# Altium PCB cap_sensor_host.PcbDoc (part 1 of 2)
Units mm, origin at the board's own origin, x right, y up, seen from the top; angles counter-clockwise.
Board outline 190 x 74 mm, 2 copper layers (Top Layer, Bottom Layer); 162 components, 95 nets, 418 pads, 260 vias.
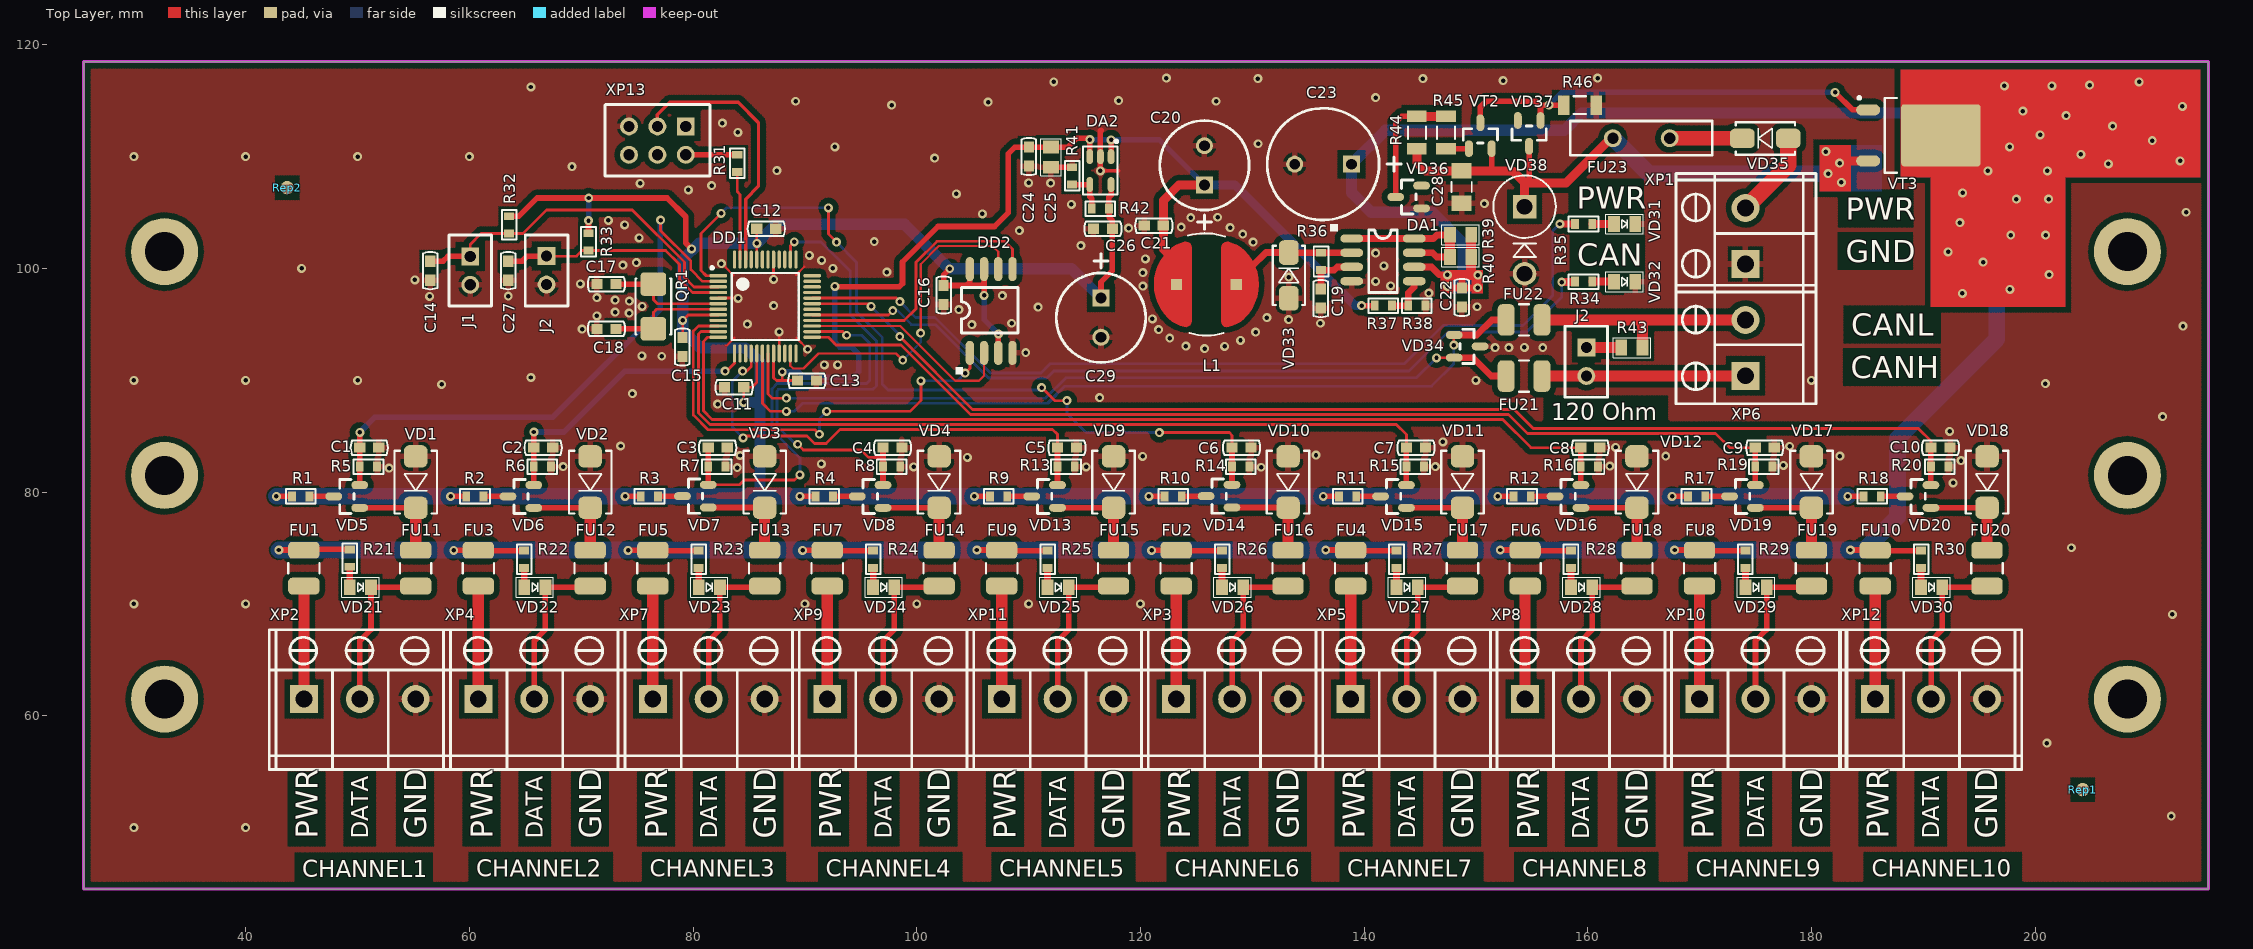
[diagram p0: Top Layer view]
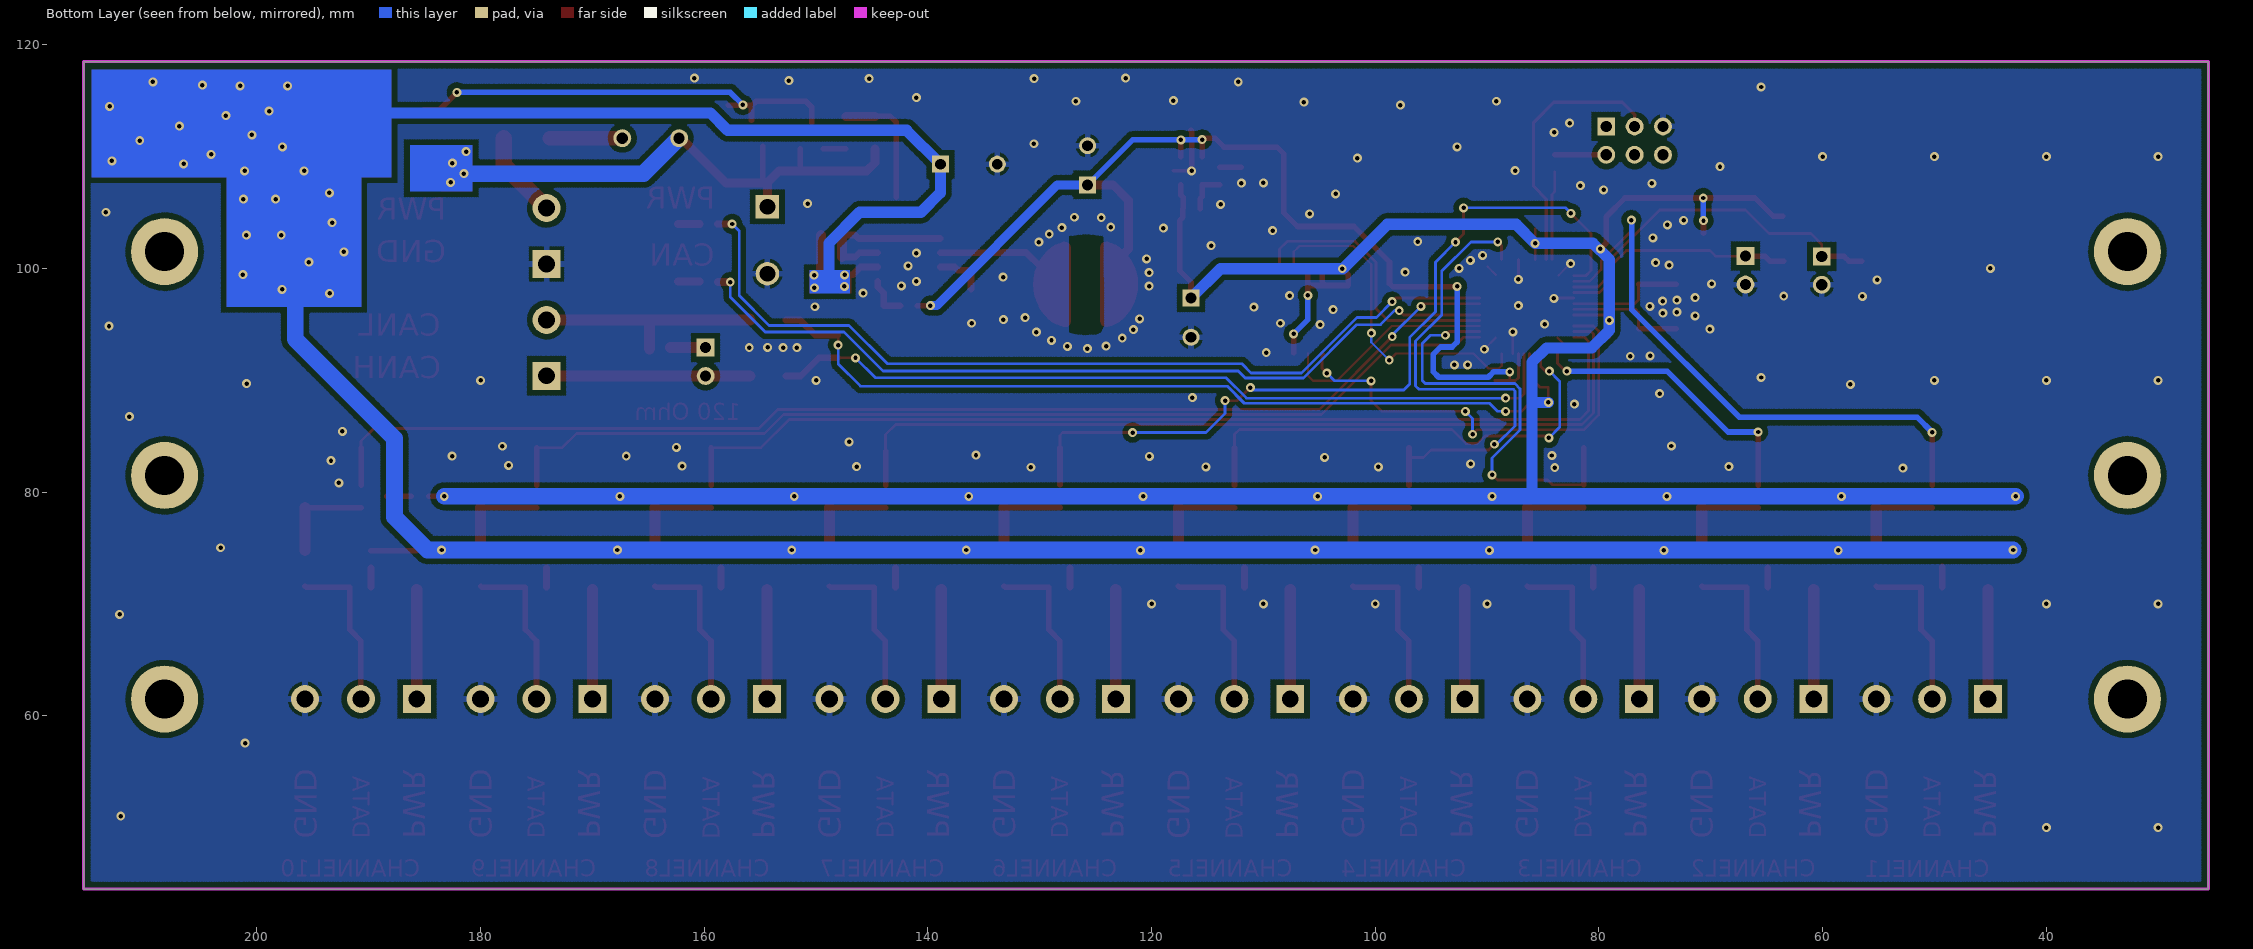
[diagram p1: Bottom Layer view, seen from below]

## Layer stack, top to bottom
Top Solder: solder mask 0.0102, Solder Resist, Dk 3.5
Top Layer: signal copper 0.0356
Dielectric 1: dielectric 0.32, FR-4, Dk 4.8
Bottom Layer: signal copper 0.0356
Bottom Solder: solder mask 0.0102, Solder Resist, Dk 3.5

## Board outline
25.5,44.5 215.5,44.5 215.5,118.5 25.5,118.5

## Design rules (kind name [scope] priority, off if disabled: settings)
Clearance Clearance_Poly [InPoly] p1: gap=0.5
Clearance [All] p2: gap=0.2
ComponentClearance [All] p1: gap=0 collisioncheckmode=3 verticalgap=0 showdistances=FALSE
HoleSize [All] p1: absolutevalues=TRUE maxlimit=6 minlimit=0.025 maxpercent=80.000 minpercent=20.000
MinimumSolderMaskSliver [All] p1: minsoldermaskwidth=0.1
PolygonConnect PolygonConnect_MCU [InComponent('DD1')] p1: connectstyle=Relief reliefconductorwidth=0.25 reliefentries=4 polygonreliefangle="90 Angle" airgapwidth=0.2
PolygonConnect PolygonConnect_term [IsPad And (PadYSize_TopLayer > 1.5) And InComponent('DA2') OR InComponent('VT3')AND InNet('+12V')] p2: connectstyle=Direct reliefconductorwidth=0.254 reliefentries=4 polygonreliefangle="90 Angle" airgapwidth=0.254
PolygonConnect PolygonConnect_via [IsVia] p3: connectstyle=Direct reliefconductorwidth=0.254 reliefentries=4 polygonreliefangle="90 Angle" airgapwidth=0.254
PolygonConnect [All] p4: connectstyle=Relief reliefconductorwidth=0.5 reliefentries=4 polygonreliefangle="90 Angle" airgapwidth=0.3
RoutingVias [All] p1: holewidth=0.4 width=0.8 viastyle="Through Hole" minholewidth=0.3 minwidth=0.6 maxholewidth=0.5 maxwidth=1
SilkToSilkClearance [All] p1: silktosilkclearance=0
SilkToSolderMaskClearance [IsPad] p1: minsilkscreentomaskgap=0.05 clearancetoexposedcopper=TRUE
SolderMaskExpansion SolderMaskExpansion_1 [IsPad And (PadYSize_TopLayer <= 0.45)] p1: expansion=0.05
SolderMaskExpansion SolderMaskExpansion_via [IsVia] p2: expansion=-10
SolderMaskExpansion [All] p3: expansion=0.076
Width [All] p1: maxlimit=5 minlimit=0.2 preferedwidth=0.5
25 further rules are at their usual default settings.

## Classes and differential pairs
component class Power: C19 C20 C21 C22 C23 C24 C25 C26 C28 C29 DA1 DA2 FU21 FU22 FU23 J2 L1 R36 R37 R38 R39 R40 R41 R42 R43 R44 R45 R46 VD33 VD34 VD35 VD36 VD37 VD38 VT2 VT3
component class Connectors: FU1 FU2 FU3 FU4 FU5 FU6 FU7 FU8 FU9 FU10 XP1 XP2 XP3 XP4 XP5 XP6 XP7 XP8 XP9 XP10 XP11 XP12
component class Input_scheme: C1 C2 C3 C4 C5 C6 C7 C8 C9 C10 FU11 FU12 FU13 FU14 FU15 FU16 FU17 FU18 FU19 FU20 R1 R2 R3 R4 R5 R6 R7 R8 R9 R10 R11 R12 R13 R14 R15 R16 R17 R18 R19 R20 VD1 VD2 VD3 VD4 VD5 VD6 VD7 VD8 VD9 VD10 VD11 VD12 VD13 VD14 VD15 VD16 VD17 VD18 VD19 VD20
component class LED_indication: R21 R22 R23 R24 R25 R26 R27 R28 R29 R30 VD21 VD22 VD23 VD24 VD26 VD27 VD28 VD29 VD30
component class MCU: C11 C12 C13 C14 C15 C16 C17 C18 C27 DD1 DD2 J1 J2 QR1 R31 R32 R33 R34 R35 Rep1 Rep2 VD31 VD32 XP13

## Components (designator, comment, footprint, x,y, rotation, side; value= is the part's Value field where it differs from the comment)
C1 "0.1uF" CC0603 51.05,83.975 r180 top
C2 "0.1uF" CC0603 66.6,83.975 r180 top
C3 "0.1uF" CC0603 82.2,83.975 r180 top
C4 "0.1uF" CC0603 97.825,83.975 r180 top
C5 "0.1uF" CC0603 113.425,83.975 r180 top
C6 "0.1uF" CC0603 129.05,83.975 r180 top
C7 "0.1uF" CC0603 144.65,83.975 r180 top
C8 "0.1uF" CC0603 160.225,83.975 r180 top
C9 "0.1uF" CC0603 175.825,83.975 r180 top
C10 "0.1uF" CC0603 191.55,83.975 r180 top
C11 "0.1uF" CC0603 83.675,89.375 r0 top
C12 "0.1uF" CC0603 86.55,103.55 r180 top
C13 "0.1uF" CC0603 90.175,89.975 r180 top
C14 "220pF" CC0603 56.5,99.8 r90 top
C15 "0.1uF" CC0603 79.05,92.975 r270 top
C16 "0.1uF" CC0603 102.4,97.625 r270 top
C17 "22pF" CC0603 72.25,98.6 r0 top
C18 "22pF" CC0603 72.25,94.6 r0 top
C19 "330pF" CC0603 136.125,97.3 r90 top
C20 "1000uFx10V" CC8X3.5 125.725,107.475 r90 top
C21 "0.1uF" CC0603 121.2,103.825 r0 top
C22 "0.1uF" CC0603 148.75,97.4 r90 top
C23 "470uF" CC16X10_CAP0.5(1)(Primary) 138.875,109.325 r180 top
C24 "0.1uF" CC0603 110.025,110 r270 top
C25 "4.7uF 6.3V" CC0805 112,109.95 r90 top
C26 "0.1uF" CC0603 116.65,103.55 r180 top
C27 "220pF" CC0603 63.475,99.8 r90 top
C28 "0.1uFx250V" CC1206 148.725,107.275 r90 top
C29 "1000uFx6.3V" CC8X3.5 116.475,97.35 r270 top
DA1 "MC33063" SO-8 138.9,102.675 r270 top
DA2 "AP2210K-ADJTRG1" SOT23-5 116.425,108.75 r270 top
DD1 "LPC11C24FBD48" LQFP-48 86.45,96.6 r0 top
DD2 "M25PE16" EIAJ_SO8 104.75,92.45 r90 top
FU1 "MICROSMD010F-2" RC1210 45.2,73.2 r270 top
FU2 "MICROSMD010F-2" RC1210 123.2,73.2 r270 top
FU3 "MICROSMD010F-2" RC1210 60.8,73.2 r270 top
FU4 "MICROSMD010F-2" RC1210 138.8,73.2 r270 top
FU5 "MICROSMD010F-2" RC1210 76.4,73.2 r270 top
FU6 "MICROSMD010F-2" RC1210 154.4,73.2 r270 top
FU7 "MICROSMD010F-2" RC1210 92,73.2 r270 top
FU8 "MICROSMD010F-2" RC1210 170,73.2 r270 top
FU9 "MICROSMD010F-2" RC1210 107.6,73.2 r270 top
FU10 "MICROSMD010F-2" RC1210 185.7,73.2 r270 top
FU11 "MICROSMD010F-2" RC1210 55.2,73.2 r90 top
FU12 "MICROSMD010F-2" RC1210 70.8,73.2 r90 top
FU13 "MICROSMD010F-2" RC1210 86.4,73.2 r90 top
FU14 "MICROSMD010F-2" RC1210 102,73.2 r90 top
FU15 "MICROSMD010F-2" RC1210 117.6,73.2 r90 top
FU16 "MICROSMD010F-2" RC1210 133.2,73.2 r90 top
FU17 "MICROSMD010F-2" RC1210 148.8,73.2 r90 top
FU18 "MICROSMD010F-2" RC1210 164.4,73.2 r90 top
FU19 "MICROSMD010F-2" RC1210 180,73.2 r90 top
FU20 "MICROSMD010F-2" RC1210 195.7,73.2 r90 top
FU21 "MICROSMD010F-2" RC1210 154.3,90.375 r0 top
FU22 "MICROSMD010F-2" RC1210 154.3,95.4 r0 top
FU23 "RXE-110" RXE-110 167.325,111.65 r180 top
J1 "PLS-02" PIN2W 60.075,101.075 r270 top
J2 "PLS-02" PIN2W 159.875,92.925 r270 top
J2 "PLS-02" PIN2W 66.9,101.1 r270 top
L1 "220uH" SDR0805 125.9,98.575 r0 top
QR1 "NX5032GA-12.000MHz LN-CD-1" AC5032_2 76.45,96.6 r270 top
R1 "4k7" RC0603 44.925,79.625 r180 top
R2 "4k7" RC0603 60.5,79.625 r180 top
R3 "4k7" RC0603 76.1,79.625 r180 top
R4 "4k7" RC0603 91.725,79.625 r180 top
R5 "100k" RC0603 50.975,82.275 r180 top
R6 "100k" RC0603 66.525,82.275 r180 top
R7 "100k" RC0603 82.125,82.275 r180 top
R8 "100k" RC0603 97.75,82.275 r180 top
R9 "4k7" RC0603 107.325,79.625 r180 top
R10 "4k7" RC0603 122.925,79.625 r180 top
R11 "4k7" RC0603 138.525,79.625 r180 top
R12 "4k7" RC0603 154.125,79.625 r180 top
R13 "100k" RC0603 113.35,82.275 r180 top
R14 "100k" RC0603 128.975,82.275 r180 top
R15 "100k" RC0603 144.575,82.275 r180 top
R16 "100k" RC0603 160.15,82.275 r180 top
R17 "4k7" RC0603 169.725,79.625 r180 top
R18 "4k7" RC0603 185.425,79.625 r180 top
R19 "100k" RC0603 175.75,82.275 r180 top
R20 "100k" RC0603 191.475,82.275 r180 top
R21 "4k7" RC0603 49.3,74.1 r90 top
R22 "4k7" RC0603 64.9,74 r90 top
R23 "4k7" RC0603 80.5,74 r90 top
R24 "4k7" RC0603 96.1,74 r90 top
R25 "4k7" RC0603 111.7,74 r90 top
R26 "4k7" RC0603 127.3,74 r90 top
R27 "4k7" RC0603 142.9,74 r90 top
R28 "4k7" RC0603 158.5,74 r90 top
R29 "4k7" RC0603 174.1,74 r90 top
R30 "4k7" RC0603 189.8,74 r90 top
R31 "100E" RC0603 83.95,109.4 r90 top
R32 "10k" RC0603 63.55,103.9 r270 top
R33 "10k" RC0603 70.65,102.375 r270 top
R34 "330E" RC0603 159.625,98.825 r0 top
R35 "330E" RC0603 159.625,103.975 r0 top
R36 "560k 1%" RC0603 136.15,100.625 r90 top
R37 "3k 1%" RC0603 141.725,96.675 r0 top
R38 "1k 1%" RC0603 144.725,96.675 r180 top
R39 "1E" RC0805 148.625,103 r0 top
R40 "1E" RC0805 148.625,101.025 r0 top
R41 "18k 1%" RC0603 113.9,108.275 r270 top
R42 "11k 1%" RC0603 116.425,105.35 r0 top
R43 "120E" RC0805 163.95,92.925 r180 top
R44 "220k" RC1206 144.725,112.15 r270 top
R45 "220k" RC1206 147.325,112.15 r90 top
R46 "220k" RC1206 159.3,114.6 r180 top
Rep1 "REPER1.2" REPER1.2 204.25,53.4 r90 top
Rep2 "REPER1.2" REPER1.2 43.7,107.225 r90 top
VD1 "P6SMBJ28A" SMB 55.2,80.9 r90 top
VD2 "P6SMBJ28A" SMB 70.8,80.9 r90 top
VD3 "P6SMBJ28A" SMB 86.4,80.9 r90 top
VD4 "P6SMBJ28A" SMB 102,80.9 r90 top
VD5 "BAT54A" SOT-23(123) 50.2,78.6 r0 top
VD6 "BAT54A" SOT-23(123) 65.775,78.6 r0 top
VD7 "BAT54A" SOT-23(123) 81.375,78.625 r0 top
VD8 "BAT54A" SOT-23(123) 97,78.6 r0 top
VD9 "P6SMBJ28A" SMB 117.6,80.9 r90 top
VD10 "P6SMBJ28A" SMB 133.2,80.9 r90 top
VD11 "P6SMBJ28A" SMB 148.8,80.9 r90 top
VD12 "P6SMBJ28A" SMB 164.4,80.9 r90 top
VD13 "BAT54A" SOT-23(123) 112.6,78.6 r0 top
VD14 "BAT54A" SOT-23(123) 128.2,78.625 r0 top
VD15 "BAT54A" SOT-23(123) 143.8,78.6 r0 top
VD16 "BAT54A" SOT-23(123) 159.4,78.6 r0 top
VD17 "P6SMBJ28A" SMB 180,80.9 r90 top
VD18 "P6SMBJ28A" SMB 195.7,80.9 r90 top
VD19 "BAT54A" SOT-23(123) 175,78.6 r0 top
VD20 "BAT54A" SOT-23(123) 190.7,78.6 r0 top
VD21 "LED_0805" LED0805 49.3,71.5 r0 top
VD22 "LED_0805" LED0805 64.9,71.5 r0 top
VD23 "LED_0805" LED0805 80.5,71.5 r0 top
VD24 "LED_0805" LED0805 96.1,71.5 r0 top
VD25 "LED_0805" LED0805 111.7,71.5 r0 top
VD26 "LED_0805" LED0805 127.3,71.5 r0 top
VD27 "LED_0805" LED0805 142.9,71.5 r0 top
VD28 "LED_0805" LED0805 158.5,71.5 r0 top
VD29 "LED_0805" LED0805 174.1,71.5 r0 top
VD30 "LED_0805" LED0805 189.8,71.5 r0 top
VD31 "LED_0805" LED0805 162.35,103.975 r0 top
VD32 "LED_0805" LED0805 162.35,98.825 r0 top
VD33 "SS14" SMA 133.275,99.375 r90 top
VD34 "PESD2CAN" SOT-23(123) 148.05,94.05 r180 top
VD35 "GS1M" SMA 175.875,111.625 r180 top
VD36 "BZX84C36" SOT-23(123) 145.15,105.375 r0 top
VD37 "BZX84C15" SOT-23(123) 155.775,113.25 r90 top
VD38 "1.5KE150A" DO-201 154.35,99.525 r90 top
VT2 "BC856B" SOT-23(123) 149.375,110.7 r270 top
VT3 "IRFR9220" D-PAK(TO-252AA) 189.575,111.9 r0 top
XP1 "DG330-5.0-02P" 330-021 174.1,100.4 r90 top
XP2 "DG330-5.0-03P" DG330-5.0-03P 45.2,61.5 r0 top
XP3 "DG330-5.0-03P" DG330-5.0-03P 123.2,61.5 r0 top
XP4 "DG330-5.0-03P" DG330-5.0-03P 60.8,61.5 r0 top
XP5 "DG330-5.0-03P" DG330-5.0-03P 138.8,61.5 r0 top
XP6 "DG330-5.0-02P" 330-021 174.1,90.4 r90 top
XP7 "DG330-5.0-03P" DG330-5.0-03P 76.4,61.5 r0 top
XP8 "DG330-5.0-03P" DG330-5.0-03P 154.4,61.5 r0 top
XP9 "DG330-5.0-03P" DG330-5.0-03P 92,61.5 r0 top
XP10 "DG330-5.0-03P" DG330-5.0-03P 170,61.5 r0 top
XP11 "DG330-5.0-03P" DG330-5.0-03P 107.6,61.5 r0 top
XP12 "DG330-5.0-03P" DG330-5.0-03P 185.7,61.5 r0 top
XP13 "PLD-06" PIN6 79.35,112.7 r180 top

## Footprints (in the part's own frame and the unit in brackets; to place one, negate y for a bottom-side part, rotate by r counter-clockwise, add the part's x,y. Pads: shape width x height; smd on the part's side, far side on the other; paste and mask are expansions set on the pad)
330-021 [mm]
  rect 2.5x2.5 hole 1.5: 1(0,0)
  round 2.5 hole 1.5: 2(5,0)
  silkscreen extent -2.5,-6.3 8.1,6.2
AC5032_2 [mm]
  rrect30% 2.1x2.3 smd: 1(-2,0) 2(2,0)
  silkscreen extent -2.5,-1.6 2.5,1.6
CC8X3.5 [mil]
  rect 60x60 hole 38: 1(0,0)
  round 60 hole 38: 2(137.8,0)
  silkscreen extent -156,-157 226,157
CC16X10_CAP0.5(1)(Primary) [mil]
  round 60 hole 38: 1(200,0)
  rect 60x60 hole 38: 2(0,0)
  silkscreen extent -175,-197 297,197
CC0603 [mm]
  rect 1x0.9 smd paste-25.4: 1(-0.85,0) 2(0.85,0)
  silkscreen extent -1.66,-0.65 1.66,0.65
CC0805 [mm]
  rect 1.15x1.45 smd paste-25.4: 1(-0.9,0) 2(0.9,0)
  silkscreen extent -1.65,-0.9 1.65,0.9
CC1206 [mm]
  rect 1.4x1.8 smd paste-25.4: 1(-1.45,0) 2(1.45,0)
  silkscreen extent -0.45,-0.9 0.45,0.9
D-PAK(TO-252AA) [mm]
  oval 2.15x1 smd: 1(-4.5,2.28) 2(-4.5,-2.28)
  rrect10% 7.1x5.55 smd: 3(2,0)
  silkscreen extent -5.42,-3.35 -1.92,3.47
DG330-5.0-03P [mm]
  rect 2.5x2.5 hole 1.5: 1(0,0)
  round 2.5 hole 1.5: 2(5,0) 3(10,0)
  silkscreen extent -3.1,-6.3 13.1,6.2
DO-201 [mm]
  round 2.1 hole 1.4: 1(0,0)
  rect 2.1x2.1 hole 1.4: 2(6,0)
  silkscreen extent 1.5,-2.8 8.8,2.8
EIAJ_SO8 [mil]
  oval 85x29.53 smd: 1(0,0) 2(0,-50) 3(0,-100) 4(0,-150) 5(295,-150) 6(295,-100) 7(295,-50) 8(295,0)
  silkscreen extent -75,-170 230,50
LED0805 [mm]
  rect 1.05x1.4 smd paste-25.4: 1(0,0) 2(1.9,0)
  silkscreen extent -0.72,-0.89 2.62,0.89
LQFP-48 [mm]
  oval 1.6x0.3 smd: 1(-4.2,2.75) 2(-4.2,2.25) 3(-4.2,1.75) 4(-4.2,1.25) 5(-4.2,0.75) 6(-4.2,0.25) 7(-4.2,-0.25) 8(-4.2,-0.75) 9(-4.2,-1.25) 10(-4.2,-1.75) 11(-4.2,-2.25) 12(-4.2,-2.75) 25(4.2,-2.75) 26(4.2,-2.25) 27(4.2,-1.75) 28(4.2,-1.25) 29(4.2,-0.75) 30(4.2,-0.25) 31(4.2,0.25) 32(4.2,0.75) 33(4.2,1.25) 34(4.2,1.75) 35(4.2,2.25) 36(4.2,2.75)
  oval 0.3x1.6 smd: 13(-2.75,-4.2) 14(-2.25,-4.2) 15(-1.75,-4.2) 16(-1.25,-4.2) 17(-0.75,-4.2) 18(-0.25,-4.2) 19(0.25,-4.2) 20(0.75,-4.2) 21(1.25,-4.2) 22(1.75,-4.2) 23(2.25,-4.2) 24(2.75,-4.2) 37(2.75,4.2) 38(2.25,4.2) 39(1.75,4.2) 40(1.25,4.2) 41(0.75,4.2) 42(0.25,4.2) 43(-0.25,4.2) 44(-0.75,4.2) 45(-1.25,4.2) 46(-1.75,4.2) 47(-2.25,4.2) 48(-2.75,4.2)
  silkscreen extent -4.87,-3 3,3.57
PIN2W [mm]
  rect 1.6x1.6 hole 1: 1(0,0)
  round 1.6 hole 1: 2(2.54,0)
  silkscreen extent -1.91,-1.91 4.44,1.91
PIN6 [mm]
  rect 1.6x1.6 hole 1: 1(0,0)
  round 1.6 hole 1: 2(0,2.54) 3(2.54,0) 4(2.54,2.54) 5(5.08,0) 6(5.08,2.54)
  silkscreen extent -2.16,-1.96 7.24,4.45
RC0603 [mm]
  rect 0.7x0.9 smd paste-25.4: 1(-0.775,0) 2(0.774,0)
  silkscreen extent -1.32,-0.65 1.33,0.65
RC0805 [mm]
  rect 1.05x1.4 smd paste-25.4: 1(-0.95,0) 2(0.95,0)
  silkscreen extent -1.67,-0.89 1.67,0.89
RC1206 [mm]
  rect 1.05x1.75 smd paste-25.4: 1(-1.45,0) 2(1.45,0)
  silkscreen extent -0.55,-0.8 0.55,0.8
RC1210 [mm]
  rrect50% 1.5x2.8 smd: 1(-1.6,0) 2(1.6,0)
  silkscreen extent -0.45,-1.4 0.45,1.4
REPER1.2 [mm]
  round 1.2 smd paste-25.4 mask-25.4: 1(0,0)
  Top Layer pour cut-out: -1.2,-1.2 1.2,-1.2 1.2,1.2 -1.2,1.2
RXE-110 [mm]
  round 1.6 hole 1: 1(0,0) 2(5.08,0)
  silkscreen extent -3.81,-1.52 8.89,1.52
SDR0805 [mm]
  rect 1x1 smd paste-25.4 mask-25.4: 1(-2.667,0) 2(2.667,0)
  Top Layer region: 1.327,-3.319 1.362,-3.503 1.461,-3.66 1.612,-3.771 1.792,-3.818 1.977,-3.797 2.318,-3.69 2.706,-3.535 3.065,-3.321 3.387,-3.053 3.392,-3.047 3.771,-2.627 4.09,-2.16 4.345,-1.654 4.53,-1.119 4.642,-0.565 4.68,0 4.642,0.565 4.53,1.119 4.345,1.654 4.09,2.16 3.771,2.627 3.392,3.047 3.381,3.059 3.063,3.323 2.709,3.534 2.325,3.688 1.996,3.791 1.806,3.813 1.62,3.764 1.465,3.65 1.363,3.488 1.327,3.299
  Top Layer region: -1.327,3.319 -1.362,3.503 -1.461,3.66 -1.612,3.771 -1.792,3.818 -1.977,3.797 -2.318,3.69 -2.706,3.535 -3.065,3.321 -3.387,3.053 -3.392,3.047 -3.771,2.627 -4.09,2.16 -4.345,1.654 -4.53,1.119 -4.642,0.565 -4.68,0 -4.642,-0.565 -4.53,-1.119 -4.345,-1.654 -4.09,-2.16 -3.771,-2.627 -3.392,-3.047 -3.381,-3.059 -3.063,-3.323 -2.709,-3.534 -2.325,-3.688 -1.996,-3.791 -1.806,-3.813 -1.62,-3.764 -1.465,-3.65 -1.363,-3.488 -1.327,-3.299
  silkscreen extent -1.66,-4.57 1.64,4.57
SMA [mm]
  rrect50% 2.2x1.75 smd: 1(-2.05,0) 2(2.05,0)
  silkscreen extent -2.65,-1.45 2.65,1.45
SMB [mm]
  rrect50% 2x2.1 smd: 1(2.3,0) 2(-2.3,0)
  silkscreen extent -2.8,-1.9 2.8,1.9
SO-8 [mil]
  oval 29.53x80 smd: 1(0,0) 2(50,0) 3(100,0) 4(150,0) 5(150,220) 6(100,220) 7(50,220) 8(0,220)
  silkscreen extent -50,-75 190,160
SOT23-5 [mm]
  oval 1.35x0.6 smd: 1(-1.25,0.95) 2(-1.25,0) 3(-1.25,-0.95) 4(1.25,-0.95) 5(1.25,0.95)
  silkscreen extent -2.74,-1.55 2.16,1.55
SOT-23(123) [mil]
  oval 59.06x28.07 smd: 1(-0.5,0) 2(-0.5,80) 3(-91.5,40)
  silkscreen extent -70,-20 -20,100

## Part data
C1 C2 C3 C4 C5 C6 C7 C8 C9 C10 C11 C12 C13 C14 C15 C16 C17 C18 C19 C21 C22 C24 C26 C27: library part CC0603, "CC0603"
C20 C29: library part CAP0.35, "CAP0.35"
C23: library part CAP0.5(1), "CAP0.5(1)"
C25: library part CC0805, "CC0805"
C28: library part CC1206, "CC1206"
DA1: library part MC34063, "MC34063"
DA2: library part MCP1824T-ADJE/OT, "300 mA, Low Voltage, Low Quiescent Current LDO Regulator, 5-Pin SOT-223, Extended Temperature, Tape and Reel"
DD2: library part S25FL016A0LMFI01, "S25FL016A0LMFI01"
FU1 FU2 FU3 FU4 FU5 FU6 FU7 FU8 FU9 FU10 FU11 FU12 FU13 FU14 FU15 FU16 FU17 FU18 FU19 FU20 FU21 FU22: library part MICROSMD, "MICROSMD"
L1: library part SDR0805, "SDR0805"
QR1: library part AC5032_2, "AC5032/2"
R1 R2 R3 R4 R5 R6 R7 R8 R9 R10 R11 R12 R13 R14 R15 R16 R17 R18 R19 R20 R21 R22 R23 R24 R25 R26 R27 R28 R29 R30 R31 R32 R33 R34 R35 R36 R37 R38 R41 R42: library part RC0603, "RC0603"
R39 R40 R43: library part RC0805, "RC0805"
R44 R45 R46: library part RC1206, "RC1206"
VD1 VD2 VD3 VD4 VD9 VD10 VD11 VD12 VD17 VD18: library part SMBJ, "SMBJ"
VD33: "Schottky Rectifier"
VD34: "TVS for CAN"
VD36 VD37: library part BZX84, "Zener Voltage Regulator Diode"
VD38: library part 1.5KE, "1.5KE"
VT3: "HEXFET Power MOSFET"
XP13: "PLD06"

## Free pads (board coordinates)
  round 6 hole 3.5 unplated: 0(32.75,81.5) 0(32.75,61.5) 0(32.75,101.5) 0(208.25,81.5) 0(208.25,61.5) 0(208.25,101.5)

## Via types
v1: diameter 0.8, hole 0.4, Top Layer to Bottom Layer, 260 vias

## Nets (pads, with @x,y where several pads share a name; then routed paths per layer and width w, separated by ;. In a path a pad name is that pad's centre, name@x,y a point inside that pad or via, vN(x,y) a via of type N, cw(c..) or ccw(c..) an arc to the next point about the centre after c; other vN are vias at no path point)
+3V3: C11.2 C12.2 C15.1 C16.1 C26.1 C29.1 DA2.5 DD1.8 DD1.17 DD1.44 DD2.3 DD2.7 DD2.8 R1.2 R2.2 R3.2 R4.2 R9.2 R10.2 R11.2 R12.2 R17.2 R18.2 R32.1 R33.1 R42.2 | length 286.1
  Top Layer w0.25: C15.1@79.05,93.825 79.075,93.85 v1(79.075,95.35) 79.575,95.85 DD1.8@82.25,95.85 ; v1(84.525,88.025) C11.2@84.525,89.375 85.275,89.375 85.7,89.8 DD1.17@85.7,92.4 ; DD1.44@85.7,100.8 v1(85.7,102.25) C12.2@85.7,103.55
  Top Layer w0.5: v1(42.75,79.625) R1.2@44.151,79.625 ; v1(58.325,79.625) R2.2@59.726,79.625 ; R32.1@63.55,104.675 64.425,104.675 66.05,106.3 v1(70.675,106.3) 77.675,106.3 79.35,104.625 79.35,102.275 v1(79.875,101.75) ; R33.1@70.65,103.15 v1(70.65,104.275) ; v1(73.925,79.625) R3.2@75.326,79.625 ; v1(89.55,79.625) R4.2@90.951,79.625 ; v1(102.95,99.975) 102.4,99.425 C16.1@102.4,98.475 104.425,98.475 ; DD2.8@104.75,99.943 104.75,98.8 104.425,98.475 ; v1(105.15,79.625) R9.2@106.551,79.625 ; v1(106.02,97.6) 106.02,98.72 ; DD2.7@106.02,99.943 106.02,98.72 ; DD2.3@107.29,92.45 107.3,92.46 v1(107.3,94.15) ; C29.1@116.475,97.35 116.475,98.775 117.5,99.8 C26.1@117.5,103.55 117.5,104.275 117.199,104.576 R42.2@117.199,105.35 117.175,105.374 117.175,106.35 117.375,106.55 DA2.5@117.375,107.5 ; v1(120.75,79.625) R10.2@122.151,79.625 ; v1(136.35,79.625) R11.2@137.751,79.625 ; v1(151.95,79.625) R12.2@153.351,79.625 ; v1(167.55,79.625) R17.2@168.951,79.625 ; v1(183.25,79.625) R18.2@184.651,79.625 ; 104.425,98.475 105.775,98.475 106.02,98.72
  Bottom Layer w0.5: v1(70.65,104.275) 70.675,104.3 v1(70.675,106.3) ; v1(106.02,97.6) 106.02,95.43 v1(107.3,94.15)
  Bottom Layer w1: v1(84.525,88.025) 85.9,88.025 ; 86.275,79.625 85.975,79.925 85.975,91.625 84.7,92.9 80.65,92.9 79.075,94.475 v1(79.075,95.35) 79.075,100.8 80.525,102.25 v1(85.7,102.25) 87.4,103.95 98.925,103.95 102.9,99.975 v1(102.95,99.975) 113.85,99.975 C29.1@116.475,97.35
  Bottom Layer w1.5: v1(42.75,79.625) v1(58.325,79.625) v1(73.925,79.625) 86.275,79.625 v1(89.55,79.625) v1(105.15,79.625) v1(120.75,79.625) v1(136.35,79.625) v1(151.95,79.625) v1(167.55,79.625) v1(183.25,79.625)
+5V: C13.2 C20.1 C21.2 C24.1 C25.2 DA2.1 DA2.3 DD1.20 L1.1 R37.1 | length 98.7
  Top Layer w0.25: DD1.20@87.2,92.4 87.2,90.225 87.45,89.975 88,89.975 ; v1(87.975,90.75) 87.975,90 88,89.975 ; C13.2@89.325,89.975 88,89.975
  Top Layer w0.5: v1(92.675,98.4) 92.7,98.375 98.45,98.375 98.725,98.65 98.725,100.575 101.9,103.75 106.95,103.75 108.175,104.975 108.175,110.25 108.775,110.85 C24.1@110.025,110.85 C25.2@112,110.85 113.525,110.85 114.3,111.625 115.375,111.625 v1(115.475,111.525) DA2.3@115.475,110 ; DA2.1@117.375,110 v1(117.375,111.5) ; v1(139.775,96.675) R37.1@140.95,96.675
  Top Layer w0.8: 123.05,100.75 122.075,101.725 122.075,106.1 123.45,107.475 C20.1@125.725,107.475
  Bottom Layer w0.5: v1(87.975,90.75) 89.425,90.75 89.9,90.275 94.325,90.275 94.825,90.775 94.825,92.3 94.15,92.975 93.125,92.975 92.675,93.425 v1(92.675,98.4) ; v1(115.475,111.525) 121.675,111.525 C20.1@125.725,107.475
  Bottom Layer w0.8: C20.1@125.725,107.475 128.425,107.475 139.225,96.675 v1(139.775,96.675)
+12V: C22.2 C23.2 DA1.6 FU1.1 FU2.1 FU3.1 FU4.1 FU5.1 FU6.1 FU7.1 FU8.1 FU9.1 FU10.1 R21.2 R22.2 R23.2 R24.2 R25.2 R26.2 R27.2 R28.2 R29.2 R30.2 R39.2 R40.2 VT3.3 | length 331.9
  Top Layer w0.5: v1(42.974,74.826) FU1.1@45.174,74.826 ; FU1.1@45.2,74.8 45.274,74.874 R21.2@49.3,74.874 ; v1(58.6,74.8) FU3.1@60.8,74.8 ; FU3.1@60.826,74.774 R22.2@64.9,74.774 ; v1(74.2,74.8) FU5.1@76.4,74.8 ; FU5.1@76.426,74.774 R23.2@80.5,74.774 ; v1(89.8,74.8) FU7.1@92,74.8 ; FU7.1@92.026,74.774 R24.2@96.1,74.774 ; v1(105.374,74.826) FU9.1@107.574,74.826 ; FU9.1@107.626,74.774 R25.2@111.7,74.774 ; v1(121,74.8) FU2.1@123.2,74.8 ; FU2.1@123.226,74.774 R26.2@127.3,74.774 ; v1(136.574,74.826) FU4.1@138.774,74.826 ; FU4.1@138.826,74.774 R27.2@142.9,74.774 ; v1(152.174,74.826) FU6.1@154.374,74.826 ; FU6.1@154.426,74.774 R28.2@158.5,74.774 ; v1(167.774,74.826) FU8.1@169.974,74.826 ; FU8.1@170.026,74.774 R29.2@174.1,74.774 ; v1(183.474,74.826) FU10.1@185.674,74.826 ; FU10.1@185.726,74.774 R30.2@189.8,74.774
  Top Layer w0.6: DA1.6@144.488,100.135 146.04,100.135 146.75,99.425 v1(147.45,99.425) ; v1@147.625,98.25 C22.2@148.75,98.25 ; 148.75,99.425 C22.2@148.75,98.25 ; v1@150.125,98.25 C22.2@148.75,98.25
  Top Layer w0.9: v1(147.45,99.425) 148.75,99.425 150.15,99.425 v1(150.175,99.4) ; 149.575,99.625 R40.2@149.575,101.025 R39.2@149.575,103
  Bottom Layer w1: 148.85,99.4 148.85,102.275 146.1,105.025 140.625,105.025 138.875,106.775 C23.2@138.875,109.325 141.9,112.35 157.9,112.35 159.45,113.9 191.725,113.9 192,113.625
  Bottom Layer w1.5: v1(42.974,74.826) v1(105.374,74.826) v1(136.574,74.826) v1(152.174,74.826) v1(167.774,74.826) v1(183.474,74.826) 184.751,74.826 187.7,77.775 187.7,84.8 196.575,93.675 196.575,111.775
  other v1: 193.5,97.775 197.75,98.125 150.15,98.275 147.475,98.4 201.25,99.45 195.35,100.575 192.225,101.475 197.825,102.975 200.95,102.975 193.275,104.1 198.325,106.2 201.2,106.2 193.525,106.75 195.775,108.725 201.1,108.725 206.55,109.35 212.975,109.625 204.1,110.2 197.725,110.875 210.475,111.425 200.45,111.95 206.925,112.725 202.775,113.675 198.9,114.075 213.175,114.5 197.25,116.325 201.5,116.325 204.875,116.4 209.3,116.675
CAN_CON: DD1.29 R34.1 | length 75.2
  Top Layer w0.25: DD1.29@90.65,95.85 97.475,95.85 v1(97.855,96.23) ; R34.1@158.8,98.775 R34.1@158.85,98.825
  Top Layer w0.7: v1(157.675,98.775) R34.1@158.8,98.775
  Bottom Layer w0.25: v1(97.855,96.23) 98.27,96.23 99.525,94.975 101.65,94.975 106.425,90.2 111.625,90.2 112.25,90.825 144,90.825 147.5,94.325 154.55,94.325 157.675,97.45 v1(157.675,98.775)
CANH: DD1.19 FU21.1 VD34.2 | length 72
  Top Layer w0.25: DD1.19@86.7,92.4 86.7,88.775 87.075,88.4 v1(88.35,88.4) ; v1(146.475,92) 146.493,92.018 VD34.2@148.063,92.018
  Top Layer w0.6: VD34.2@148.063,92.018 149.732,92.018 151.375,90.375 FU21.1@152.7,90.375
  Bottom Layer w0.25: v1(88.35,88.4) 111.525,88.4 113.35,90.225 144.7,90.225 v1(146.475,92)
CANL: DD1.18 FU22.1 VD34.1 | length 76.3
  Top Layer w0.25: DD1.18@86.2,92.4 86.2,87.95 86.925,87.225 v1(88.35,87.225) ; v1(148.025,93.15) 148.025,94.012 VD34.1@148.063,94.05
  Top Layer w0.6: VD34.1@148.063,94.05 150.075,94.05 151.425,95.4 FU22.1@152.7,95.4
  Bottom Layer w0.25: v1@88.45,87.125 v1(88.35,87.225) 89.05,87.225 89.775,87.95 111.711,87.95 113.236,89.475 146.025,89.475 148.025,91.475 v1(148.025,93.15)
GND: C1.1 C2.1 C3.1 C4.1 C5.1 C6.1 C7.1 C8.1 C9.1 C10.1 C11.1 C12.1 C13.1 C14.1 C15.2 C16.2 C17.1 C18.1 C19.1 C20.2 C21.1 C22.1 C23.1 C24.2 C25.1 C26.2 C27.1 C28.1 C29.2 DA1.4 DA2.2 DD1.5 DD1.21 DD1.41 DD2.4 J1.2 J2.2@66.9,98.56 R5.1 R6.1 R7.1 R8.1 R13.1 R14.1 R15.1 R16.1 R19.1 R20.1 R38.1 R41.1 R46.1 VD1.1 VD2.1 VD3.1 VD4.1 VD9.1 VD10.1 VD11.1 VD12.1 VD17.1 VD18.1 VD31.2 VD32.2 VD33.1 VD34.3 VD36.1 VD38.1 XP1.1 XP2.3 XP3.3 XP4.3 XP5.3 XP7.3 XP8.3 XP9.3 XP10.3 XP11.3 XP12.3 XP13.5 | length 17.2
  Top Layer w0.2: 82.9,93.1 83,93.1 83.7,93.8 ; 82.9,100.1 83.6,99.4 ; 89.207,99.407 89.95,100.15 ; 89.25,93.798 89.25,93.775 v1(90.25,92.775)
  Top Layer w0.25: DD1.5@82.25,97.35 v1@84,97.35 ; v1(87.2,99.025) DD1.41@87.2,100.8 ; DD1.21@87.7,92.4 v1(87.7,94.325)
  Top Layer w0.3: v1(116.425,108.725) 118.025,108.725 118.05,108.75
  Top Layer w0.5: C25.1@112,109.05 R41.1@113.9,109.05 ; v1(116.425,108.725) DA2.2@116.425,110 116.425,112.3 116.475,112.35
  other v1: 30,50 40,50 212.175,51.025 201.05,57.55 212.275,69.075 30,70 40,70 90,70 100,70 110,70 120,70 203.25,75.025 192.675,80.825 52.825,82.15 83.95,82.2 130.8,82.225 99.725,82.25 115.15,82.25 68.375,82.275 146.375,82.275 161.975,82.325 177.5,82.4 91.475,82.525 193.375,82.825 104.525,83.1 120.2,83.2 166.975,83.225 182.55,83.225 84.2,83.275 135.7,83.3 162.488,84 178.05,84.1 73.525,84.125 147.05,84.5 192.35,85.425 211.4,86.75 82.2,87.875 116.35,88.45 74.575,88.8 57.525,89.625 200.925,89.7 30,90 40,90 50,90 150,90 180,90 65.5,90.25 91.75,91.375 92.925,91.375 77.2,92.15 75.425,92.175 109.75,92.475 125.75,92.825 151.725,92.925 152.95,92.925 155.975,92.925 154.325,92.95 127.525,93.025 124.075,93.05 128.95,93.575 122.625,93.775 130.3,94.3 121.625,94.525 70.075,94.575 213.225,94.85 104.925,94.975 84.85,95.025 108.475,95.1 136.1,95.1 133.25,95.425 121.075,95.5 131.3,95.6 71.4,95.75 74.275,96 73.025,96.1 103.775,96.325 110.85,96.55 150.1,96.575 75.45,96.6 87.2,96.675 74.3,97.075 73.025,97.175 84.025,97.325 71.4,97.4 56.45,97.5 63.475,97.525 107.65,97.575 145.792,97.8 120.225,98.425 142.375,98.45 69.925,98.625 141.025,98.85 55.125,98.975 133.275,99.225 120.225,99.625 97.325,99.675 45,100 92.5,100 141.775,100.225 73.725,100.3 82.525,100.425 74.925,100.525 91.5,100.725 120.45,100.85 90.4,101.175 141.025,101.375 114.675,102.05 130.075,102.35 96.2,102.4 75.175,102.725 129.15,103.075 109.175,103.375 118.95,103.6 128.025,103.65 123.65,103.7 73.875,103.9 72.425,104.3 124.5,104.55 126.9,104.577 105.875,104.875 213.5,105.025 113.825,105.725 150.75,105.8 103.55,106.675 79.575,107.025 81.65,107.4 75.275,107.6 111.975,107.625 110,107.65 87.5,108.75 69.175,109.1 101.6,109.875 30,110 40,110 50,110 60,110 92.675,110.875 130.525,111.15 84,112.175 82.625,113 97.75,114.6 106.375,114.875 89.175,114.95 126.775,114.95 118.05,115 141.025,115.275 65.5,116.225 112.25,116.675 152.425,116.8 130.5,116.975 145.25,116.975 122.325,117.025 160.875,117.025
INPUT1: C1.2 DD1.2 R5.2 VD5.2 | length 52.6
  Top Layer w0.25: v1(77.1,104.325) 77.1,103.375 79.8,100.675 79.8,99.9 80.85,98.85 DD1.2@82.25,98.85
  Top Layer w0.5: VD5.2@50.187,80.632 50.187,83.962 C1.2@50.2,83.975 v1(50.2,85.35)
  Bottom Layer w0.5: v1(50.2,85.35) 51.55,86.7 67.45,86.7 77.075,96.325 77.075,104.3 v1(77.1,104.325)
INPUT2: C2.2 DD1.13 R6.2 VD6.2 | length 26.1
  Top Layer w0.25: v1@82.875,90.85 83.025,90.85 83.7,91.525 DD1.13@83.7,92.4
  Top Layer w0.5: VD6.2@65.762,80.632 65.762,83.963 C2.2@65.75,83.975 65.75,85.35 v1(65.775,85.375)
  Bottom Layer w0.5: v1(65.775,85.375) 68.45,85.375 73.9,90.825 v1(82.875,90.825)
INPUT3: C3.2 DD1.26 R7.2 VD7.2 | length 38.6
  Top Layer w0.25: VD7.2@81.362,80.657 84.157,80.657 84.575,81.075 89.075,81.075 v1(89.55,81.55) ; DD1.26@90.65,94.35 93.4,94.35 v1(93.725,94.025)
  Top Layer w0.5: C3.2@81.35,83.975 81.362,83.963 VD7.2@81.362,80.657
  Bottom Layer w0.25: v1(89.55,81.55) 89.55,83.058 87.05,85.558 87.05,89.236 87.514,89.7 95.525,89.7 95.8,89.975 95.8,93.289 95.064,94.025 v1(93.725,94.025)
INPUT4: C4.2 DD1.38 R8.2 VD8.2 | length 45.3
  Top Layer w0.25: DD1.38@88.7,100.8 88.7,102.025 v1(89.05,102.375) ; v1(89.354,84.279) 89.858,83.775 95.025,83.775 95.7,83.1 96.987,83.1
  Top Layer w0.5: C4.2@96.975,83.975 96.987,83.963 96.987,83.1 VD8.2@96.987,80.632
  Bottom Layer w0.25: v1(89.05,102.375) 91.45,102.375 94.05,99.775 94.05,95.85 96.4,93.5 96.4,89.5 96.1,89.2 87.65,89.2 87.5,89.05 87.5,85.925 89.146,84.279 v1(89.354,84.279)
INPUT5: C5.2 DD1.16 R13.2 VD13.2 | length 42.6
  Top Layer w0.25: v1(84.425,90.825) 84.8,90.825 85.2,91.225 DD1.16@85.2,92.4 ; v1(84.475,84.85) 84.65,85.025 90.2,85.025 90.875,84.35 91.9,84.35 93.15,85.6 112.15,85.6 112.575,85.175 C5.2@112.575,83.975
  Top Layer w0.5: C5.2@112.575,83.975 112.587,83.963 VD13.2@112.587,80.632
  Bottom Layer w0.25: v1(84.425,90.825) 83.5,89.9 83.5,85.825 v1(84.475,84.85)